# Altium PCB PCB.PcbDoc
Units mm, origin at the board's own origin, x right, y up, seen from the top; angles counter-clockwise.
Board outline 99.82 x 100 mm, 2 copper layers (Top Layer, Bottom Layer); 19 components, 25 nets, 103 pads, 1 vias.
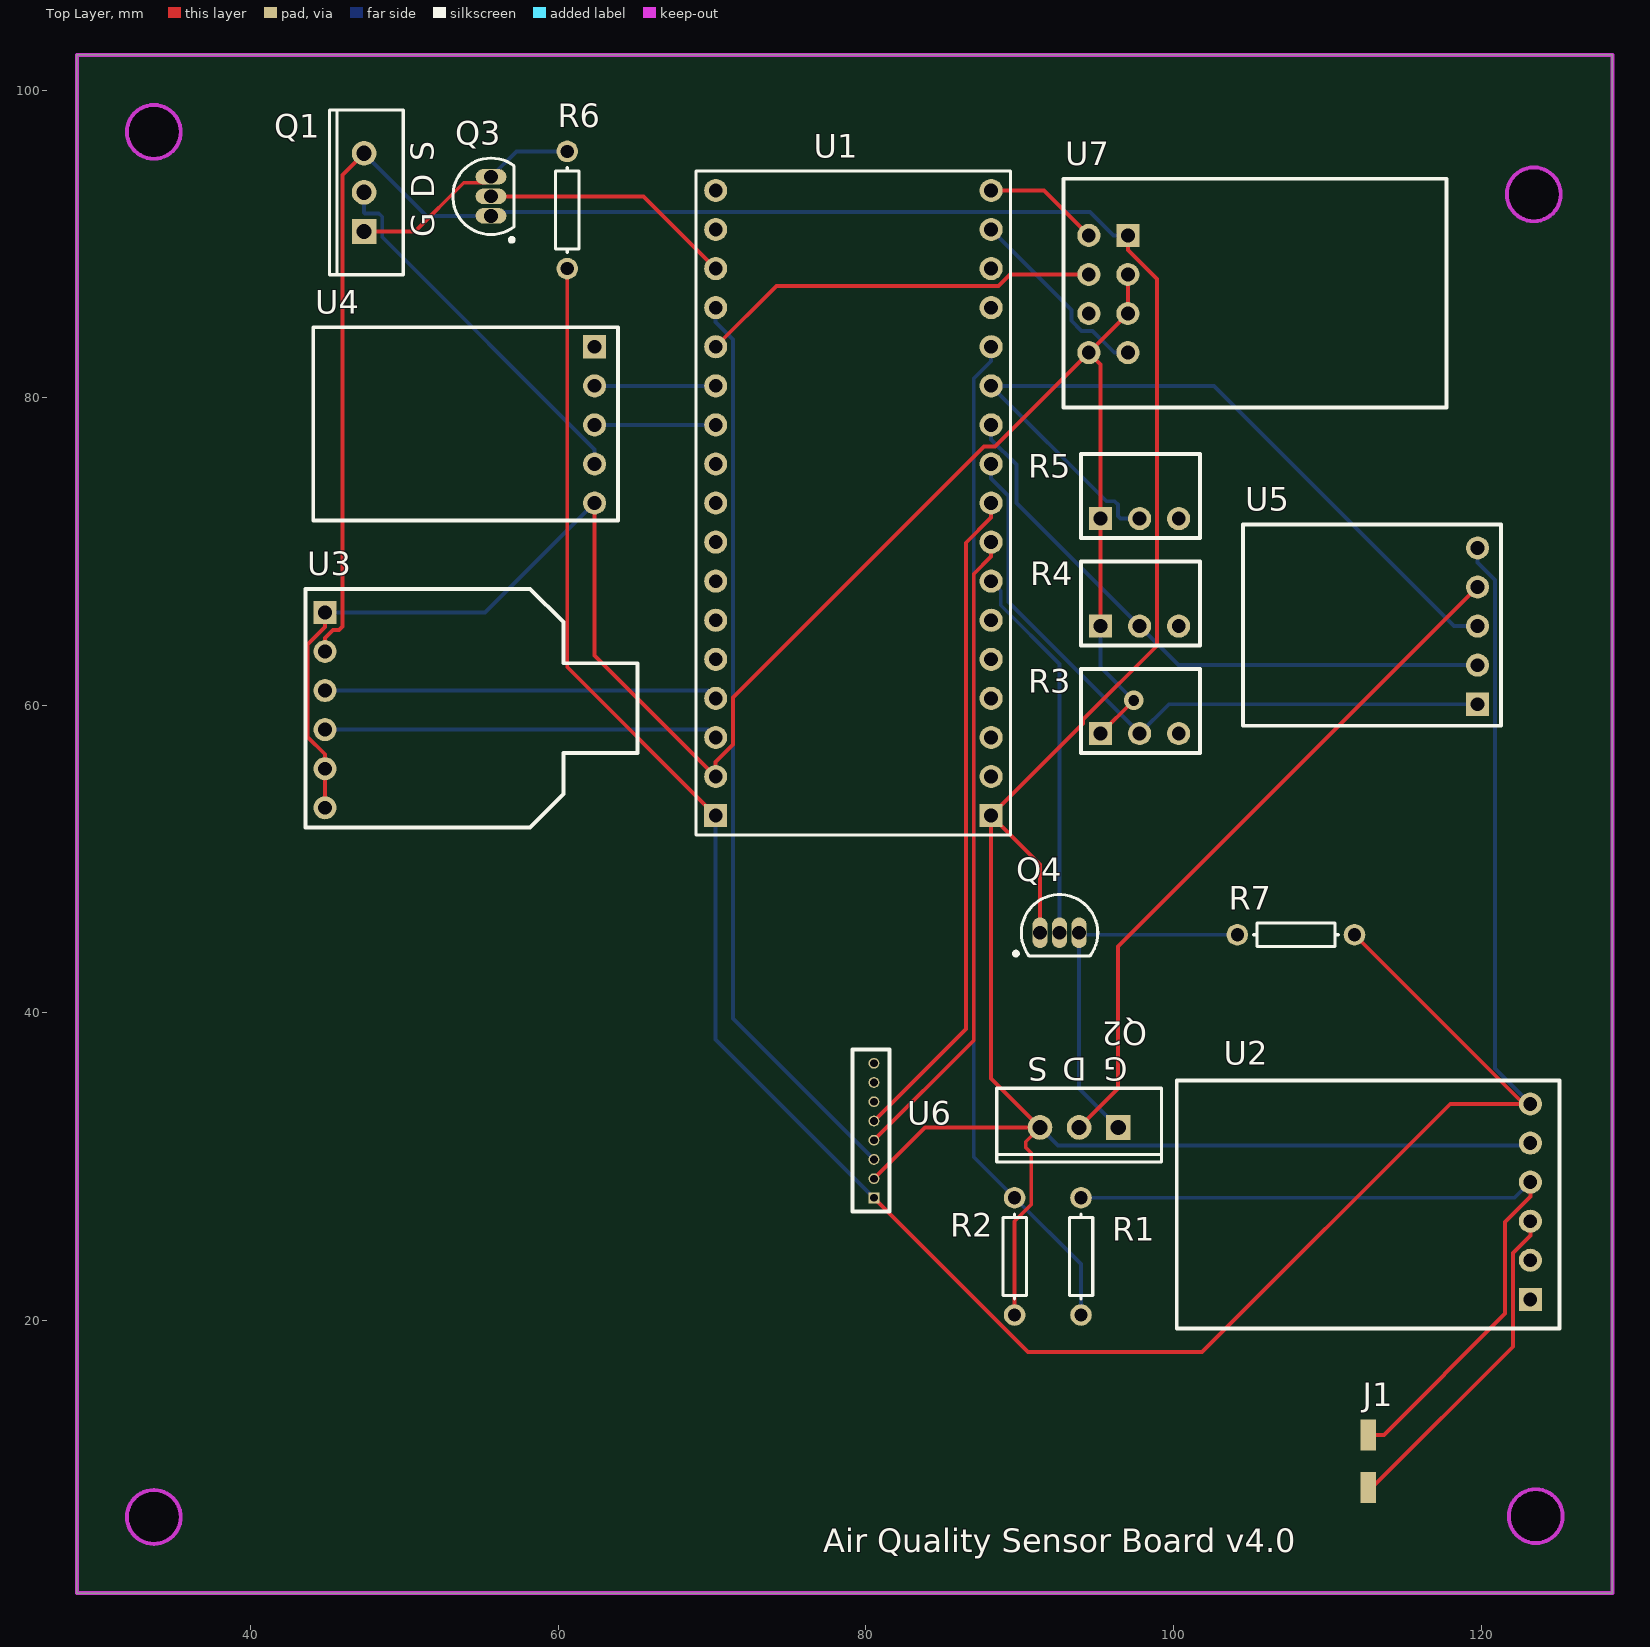
[diagram p0: Top Layer view]
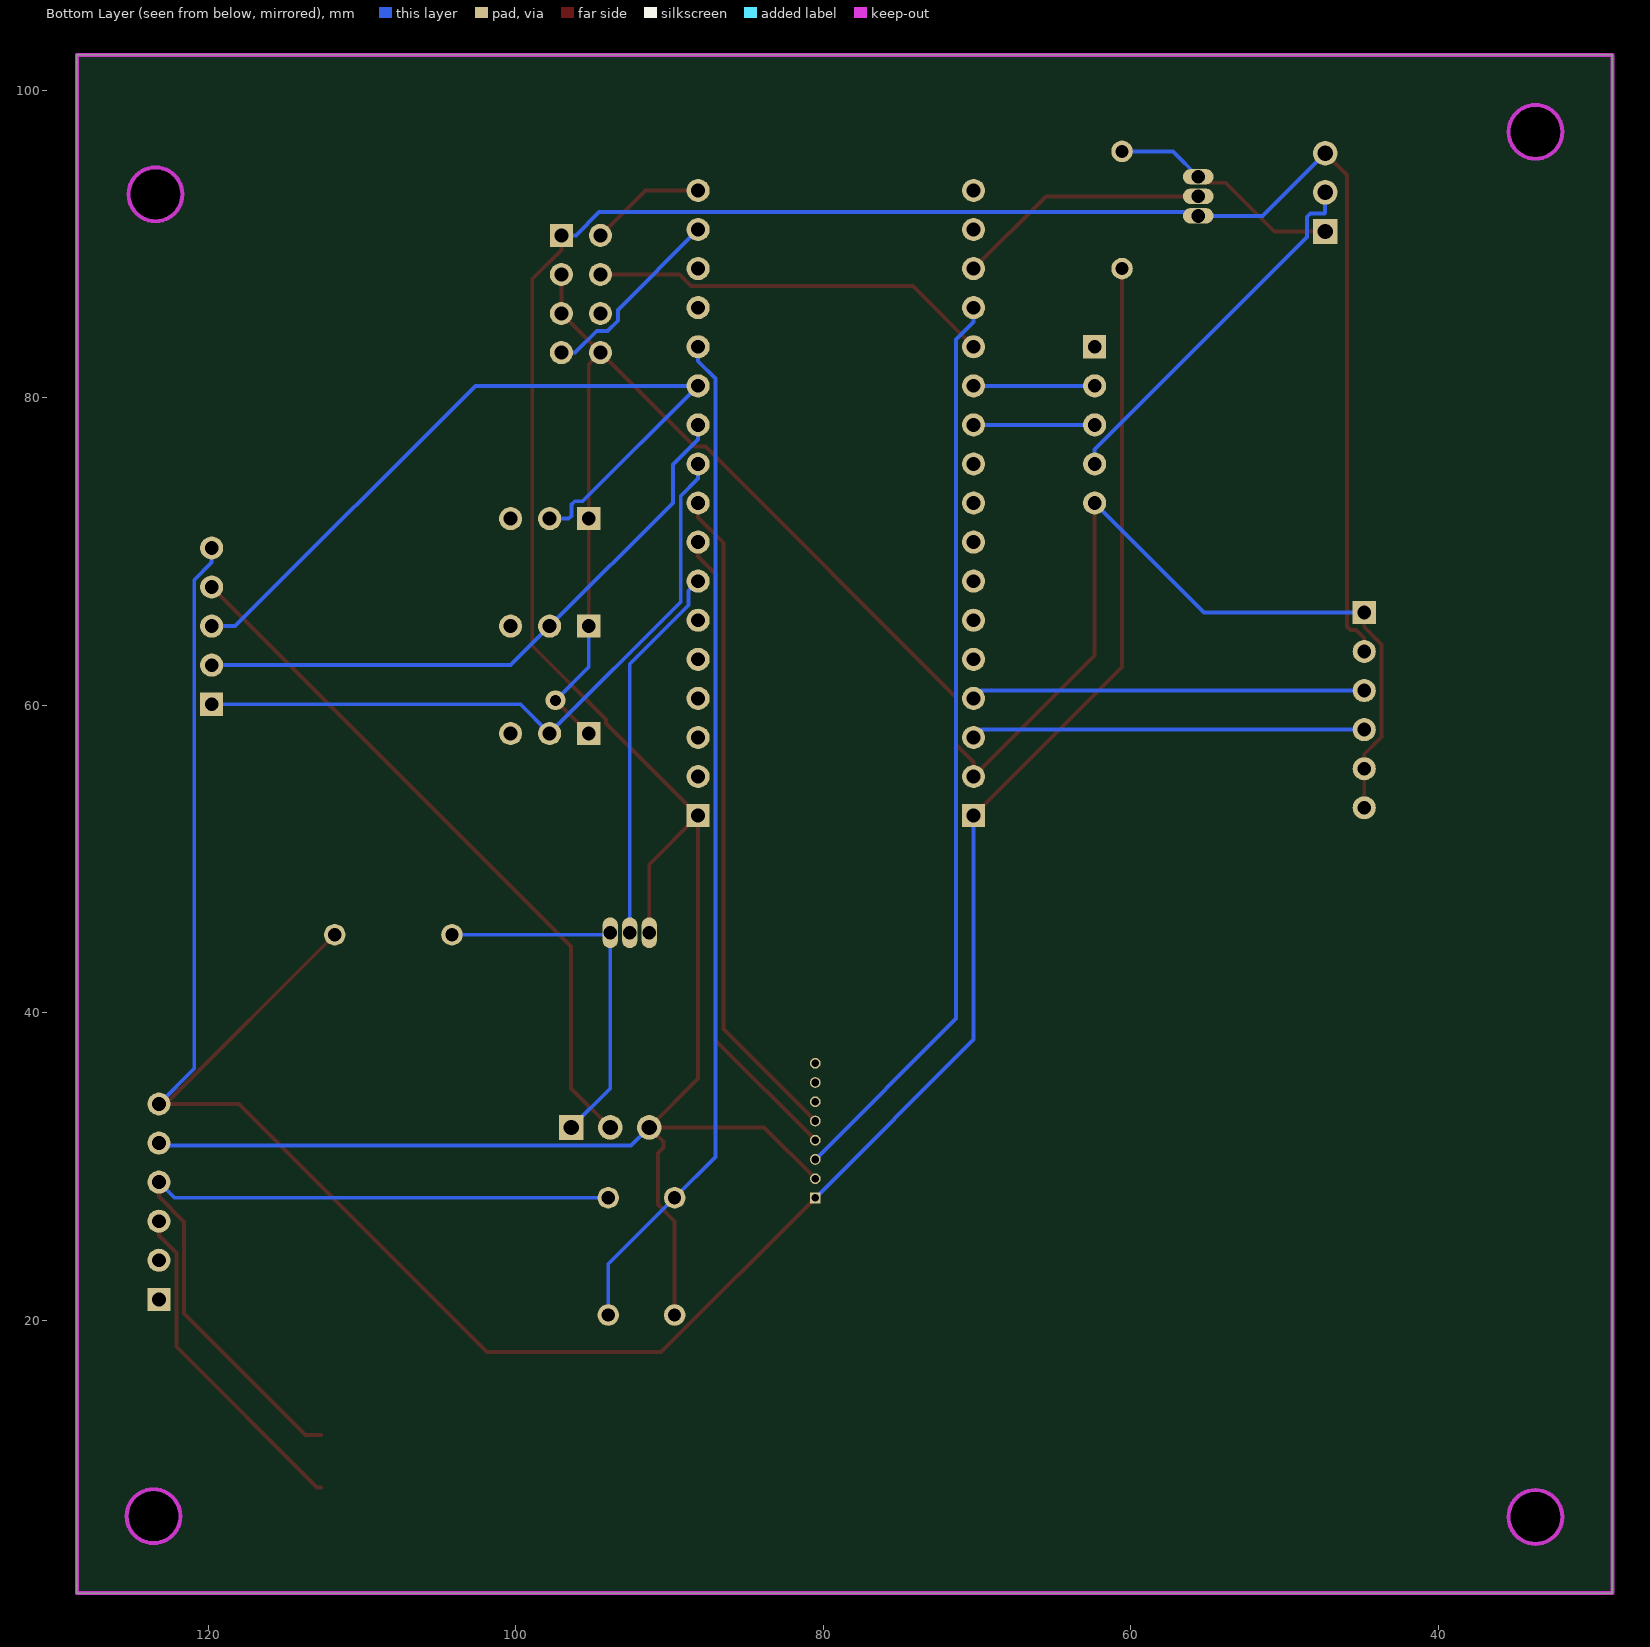
[diagram p1: Bottom Layer view, seen from below]

## Layer stack, top to bottom
Top Solder: solder mask 0.0102, Solder Resist, Dk 3.5
Top Layer: signal copper 0.0356
Dielectric 1: dielectric 0.32, FR-4, Dk 4.8
Bottom Layer: signal copper 0.0356
Bottom Solder: solder mask 0.0102, Solder Resist, Dk 3.5

## Board outline
28.702,2.286 28.702,102.286 128.524,102.286 128.524,2.286
cut-out: 121.665,93.222 ccw(c123.415,93.222) 123.415,91.472 ccw(c123.415,93.222) 125.165,93.222 ccw(c123.415,93.222) 123.415,94.972 ccw(c123.415,93.222)
cut-out: 121.792,7.286 ccw(c123.542,7.286) 123.542,5.536 ccw(c123.542,7.286) 125.292,7.286 ccw(c123.542,7.286) 123.542,9.036 ccw(c123.542,7.286)
cut-out: 31.952,7.286 ccw(c33.702,7.286) 33.702,5.536 ccw(c33.702,7.286) 35.452,7.286 ccw(c33.702,7.286) 33.702,9.036 ccw(c33.702,7.286)
cut-out: 33.702,95.536 cw(c33.702,97.286) 31.952,97.286 cw(c33.702,97.286) 33.702,99.036 cw(c33.702,97.286) 35.452,97.286 cw(c33.702,97.286)

## Design rules (kind name [scope] priority, off if disabled: settings)
Clearance [All] p1: gap=0.254 ignorepadtopadclearanceinfootprint=FALSE except(0: Arc-Hole Track-Hole SMDPad-Hole THPad-Hole Via-Hole Fill-Hole Poly-Hole Region-Hole Text-Hole)
PolygonConnect [All] p1: connectstyle=Relief reliefconductorwidth=0.254 reliefentries=4 polygonreliefangle="90 Angle" airgapwidth=0.254
RoutingVias [All] p1: holewidth=0.711 width=1.27 viastyle="Through Hole" minholewidth=0.711 minwidth=1.27 maxholewidth=0.711 maxwidth=1.27
SolderMaskExpansion [All] p1: expansion=0.102
Width [All] p1: maxlimit=0.254 minlimit=0.254 preferedwidth=0.254
30 further rules are at their usual default settings.

## Components (designator, comment, footprint, x,y, rotation, side; value= is the part's Value field where it differs from the comment)
J1 "Battery" Battery 112.268,13.208 r270 top
Q1 "MOSFET-N" TO-220-AB 47.371,93.345 r90 top
Q2 "MOSFET-N" TO-220-AB 93.853,32.559 r180 top
Q3 "2N5551" TO-92A 55.626,93.091 r0 top
Q4 "2N5551" TO-92A 92.583,45.212 r270 top
R1 "Res1" AXIAL-0.3 93.98,24.177 r90 top value=1K
R2 "Res1" AXIAL-0.3 89.662,24.177 r90 top value=1K
R3 "potentiometer" potentiometer 100.33,58.166 r90 top
R4 "potentiometer" potentiometer 100.33,65.151 r90 top
R5 "potentiometer" potentiometer 100.33,72.136 r90 top
R6 "Res1" AXIAL-0.3 60.579,92.202 r270 top value=1K
R7 "Res1" AXIAL-0.3 107.95,45.085 r0 top value=1K
U1 "STM32_Dev" STM32_Dev 68.834,74.168 r0 top
U2 "18650" 18650_Manage 123.19,21.383 r0 top
U3 "BME680_Dev" BME680_Dev 44.831,53.34 r0 top
U4 "ATGM336H_Dev" AGTM336H_Dev 62.357,83.312 r180 top
U5 "MiCS-6814_Dev" MiCS6814 119.761,70.231 r180 top
U6 "PMS5003" PMS5003 80.518,27.98 r0 top
U7 "esp01" ESP01 94.488,82.931 r0 top

## Footprints (in the part's own frame and the unit in brackets; to place one, negate y for a bottom-side part, rotate by r counter-clockwise, add the part's x,y. Pads: shape width x height; smd on the part's side, far side on the other; paste and mask are expansions set on the pad)
18650_Manage [mm]
  rect 1.5x1.5 hole 0.9: 1(0,0)
  round 1.5 hole 0.9: 2(0,2.54) 3(0,5.08) 4(0,7.62) 5(0,10.16) 6(0,12.7)
  silkscreen extent -22.99,-1.91 1.91,14.22
AGTM336H_Dev [mm]
  round 1.5 hole 0.9: 1(0,10.16) 2(0,7.62) 3(0,5.08) 4(0,2.54)
  rect 1.5x1.5 hole 0.9: 5(0,0)
  silkscreen extent -1.52,-1.27 18.29,11.3
AXIAL-0.3 [mm] "Axial Device, Thru-Hole; 2 Leads; 0.3 in Pin Spacing"
  round 1.4 hole 0.85: 1(-3.81,0) 2(3.81,0)
  silkscreen extent -2.77,-0.76 2.77,0.76
Battery [mm]
  rect 2x1 smd: 1(0.635,0.381) 2(4.064,0.381)
BME680_Dev [mm]
  rect 1.5x1.5 hole 0.9: 1(0,12.7)
  round 1.5 hole 0.9: 2(0,10.16) 3(0,7.62) 4(0,5.08) 5(0,2.54) 6(0,0)
  silkscreen extent -1.27,-1.27 20.32,14.22
ESP01 [mm]
  rect 1.5x1.5 hole 0.9: 1(2.54,7.62)
  round 1.5 hole 0.9: 2(2.54,5.08) 3(2.54,2.54) 4(2.54,0) 5(0,0) 6(0,2.54) 7(0,5.08) 8(0,7.62)
  silkscreen extent -1.65,-3.56 23.24,11.3
MiCS6814 [mm]
  rect 1.5x1.5 hole 0.9: 1(0,10.16)
  round 1.5 hole 0.9: 2(0,7.62) 3(0,5.08) 4(0,2.54) 5(0,0)
  silkscreen extent -1.52,-1.52 15.24,11.56
PMS5003 [mm] "Molex 1.25mm 8p"
  rect 0.7x0.7 hole 0.5: 1(0,0)
  round 0.7 hole 0.5: 2(0,1.25) 3(0,2.5) 4(0,3.75) 5(0,5) 6(0,6.25) 7(0,7.5) 8(0,8.75)
  silkscreen extent -1.4,-0.89 1.02,9.65
potentiometer [mm]
  rect 1.5x1.5 hole 0.9: 1(0,5.08)
  round 1.5 hole 0.9: 2(0,2.54) 3(0,0)
  silkscreen extent -1.27,-1.4 4.19,6.35
STM32_Dev [mm]
  round 1.5 hole 0.9: 1(19.304,19.304) 2(19.304,16.764) 3(19.304,14.224) 4(19.304,11.684) 5(19.304,9.144) 6(19.304,6.604) 7(19.304,4.064) 8(19.304,1.524) 9(19.304,-1.016) 10(19.304,-3.556) 11(19.304,-6.096) 12(19.304,-8.636) 13(19.304,-11.176) 14(19.304,-13.716) 15(19.304,-16.256) 16(19.304,-18.796) 19(1.397,-18.796) 20(1.397,-16.256) 21(1.397,-13.716) 22(1.397,-11.176) 23(1.397,-8.636) 24(1.397,-6.096) 25(1.397,-3.556) 26(1.397,-1.016) 27(1.397,1.524) 28(1.397,4.064) 29(1.397,6.604) 30(1.397,9.144) 31(1.397,11.684) 32(1.397,14.224) 33(1.397,16.764) 34(1.397,19.304)
  rect 1.5x1.5 hole 0.9: 17(19.304,-21.336) 18(1.397,-21.336)
  silkscreen extent 0.13,-22.61 20.57,20.57
TO-92A [mm] "TO, Flat Index; 3 In-Line, Axial Leads; Body Dia. 4.5mm; Leads 0.51 x 0.48 mm (max)"
  oval 2x1 hole 0.9: 1(0,-1.27) 2(0,0) 3(0,1.27)
  silkscreen extent -2.48,-2.95 1.5,2.48, body extent -2.48,-2.5 1.5,2.5, height 6.86
TO-220-AB [mm] "TO, Thru-Hole, Vertical, Heatsink Mounted; 3 In-Line Leads; Pitch 2.54 mm"
  rect 1.6x1.6 hole 1: 1(-2.54,0)
  round 1.6 hole 1: 2(0,0) 3(2.54,0)
  silkscreen extent -5.35,-2.55 5.35,2.25

## Part data
Q1 Q2: "N-Channel MOSFET", LatestRevisionDate=17-Jul-2002, LatestRevisionNote="Re-released for DXP Platform.", PackageDescription="TO, Flat Index; 3 In-Line, Axial Leads; Body Dia. 4.6mm; Lead Dia. 0.5 mm (max)", PackageReference=E3, PackageVersion=1995/1996, Published=8-Jun-2000, Publisher="Altium Limited"
Q3 Q4: library part 2N3904, "NPN General Purpose Amplifier", ComponentLink1Description="Manufacturer Link", ComponentLink1URL=http://www.fairchildsemi.com/, ComponentLink2Description=Datasheet, ComponentLink2URL=http://www.fairchildsemi.com/ds/2N%2F2N3904.pdf, DatasheetVersion=1997, LatestRevisionDate=15-Jan-2003, LatestRevisionNote="PCB Footprint 'BCY-W3/D4.7' replaced", PackageDescription="TO, Flat Index; 3 In-Line, Axial Leads; Body Dia. 4.5mm; Leads 0.51 x 0.48 mm (max)", PackageReference=TO-92A, PackageVersion=Sep-1998, Published=8-Jun-2000, Publisher="Altium Limited"
R1 R2 R6 R7: "Resistor", LatestRevisionDate=17-Jul-2002, LatestRevisionNote="Re-released for DXP Platform.", PackageDescription="Axial Device, Thru-Hole; 2 Leads; 0.3 in Pin Spacing", PackageReference=AXIAL-0.3, Published=8-Jun-2000, Publisher="Altium Limited"

## Via types
v1: diameter 1.27, hole 0.711, Top Layer to Bottom Layer, 1 vias

## Nets (pads, with @x,y where several pads share a name; then routed paths per layer and width w, separated by ;. In a path a pad name is that pad's centre, name@x,y a point inside that pad or via, vN(x,y) a via of type N, cw(c..) or ccw(c..) an arc to the next point about the centre after c; other vN are vias at no path point)
3.3V: R3.1 R4.1 R5.1 U1.19 U3.1 U3.5 U3.6 U4.1 U7.2 U7.3 U7.5 | length 126.2
  Top Layer w0.254: U3.6 U3.5 44.831,56.821 43.7,57.952 43.7,63.968 44.831,65.099 U3.1 ; U4.1 62.357,63.246 U1.19 70.231,56.313 71.362,57.444 71.362,60.515 87.67,76.823 88.38,76.823 U7.5 ; R3.1 v1(97.409,60.325) ; R4.1 R5.1 95.25,82.169 U7.5 ; U7.2 U7.3 U7.5
  Bottom Layer w0.254: U3.1 55.245,66.04 U4.1 ; R4.1 95.25,62.484 v1(97.409,60.325)
+5: R6.2 R7.2 U1.18 U2.6 U5.5 U6.1 | length 175.3
  Top Layer w0.254: R6.2 60.579,62.484 U1.18 ; U6.1 90.544,17.954 101.854,17.954 117.983,34.083 U2.6@122.762,34.083 ; R7.2 U2.6@122.762,34.083 ; U2.6 U2.6@122.762,34.083
  Bottom Layer w0.254: U1.18 70.231,38.267 U6.1 ; U5.5 119.761,69.29 120.892,68.159 120.892,36.381 U2.6
GND: Q1.3 Q2.3 Q3.1 Q4.1 R2.1 U1.17 U2.5 U3.2 U6.2 U7.1 | length 217.6
  Top Layer w0.254: U3.2@45.212,63.881 U3.2 44.831,64.381 45.359,64.909 45.739,64.909 45.962,65.132 45.962,94.476 Q1.3 ; U6.2 83.847,32.559 Q2.3 ; R2.1 89.662,26.458 90.743,27.539 90.743,30.908 90.386,31.265 90.386,31.632 Q2.3 ; Q4.1 91.313,49.657 U1.17 ; U7.1 97.028,89.61 98.921,87.717 98.921,63.876 94.119,59.074 94.119,58.813 U1.17 ; U1.17 88.138,35.734 Q2.3
  Bottom Layer w0.254: Q1.3 51.435,91.821 Q3.1 55.868,92.063 94.575,92.063 96.087,90.551 U7.1 ; Q2.3 92.494,31.378 123.19,31.378 U2.5
NetJ1_1: J1.1 R1.2 U2.4 | length 51
  Top Layer w0.254: J1.1 113.665,12.573 121.551,20.459 121.551,26.423 123.19,28.062 U2.4
  Bottom Layer w0.254: R1.2 122.174,27.987 U2.4
NetJ1_2: J1.2 U2.3 | length 21.8
  Top Layer w0.254: J1.2 112.903,9.144 122.059,18.3 122.059,24.391 123.19,25.522 U2.3
NetQ1_1: Q1.1 Q3.3 R6.1 | length 15.4
  Top Layer w0.254: Q1.1 50.683,90.805 53.85,93.972 55.237,93.972 Q3.3
  Bottom Layer w0.254: Q3.3 57.277,96.012 R6.1
NetQ1_2: Q1.2 U4.2 | length 24.4
  Bottom Layer w0.254: Q1.2 47.371,92.034 47.419,91.986 48.329,91.986 48.552,91.763 48.552,90.438 62.357,76.633 U4.2
NetQ2_1: Q2.1 Q4.3 R7.1 | length 24
  Bottom Layer w0.254: Q2.1 93.853,35.099 Q4.3 93.98,45.085 R7.1
NetQ2_2: Q2.2 U5.4 | length 46.2
  Top Layer w0.254: Q2.2 96.393,35.099 96.393,44.323 U5.4
  Bottom Layer w0.254: Q2.2 Q2.2@94.119,32.825
PA1: Q4.2 U1.11 | length 24.7
  Bottom Layer w0.254: U1.11 88.761,67.449 88.761,66.508 92.583,62.686 Q4.2
PA2: U1.10 U6.4 | length 42
  Top Layer w0.254: U6.4 87.007,38.219 87.007,68.54 88.138,69.671 U1.10
PA3: U1.9 U6.5 | length 43.3
  Top Layer w0.254: U6.5 86.499,38.961 86.499,70.572 88.138,72.211 U1.9
PA4: R3.2 U1.8 U5.1 | length 44.3
  Bottom Layer w0.254: U1.8 88.138,74.751 89.269,73.62 89.269,66.719 97.79,58.198 R3.2 99.695,60.071 U5.1
PA5: R4.2 U1.7 U5.2 | length 40.1
  Bottom Layer w0.254: U1.7 88.138,77.291 89.777,75.652 89.777,73.164 R4.2 100.33,62.611 U5.2
PA6: R5.2 U1.6 U5.3 | length 51.8
  Bottom Layer w0.254: R5.2 96.55,72.136 96.381,72.305 96.381,73.044 96.158,73.267 95.643,73.267 U1.6 102.616,80.772 118.237,65.151 U5.3
PA7: R1.1 R2.2 U1.5 | length 66.3
  Bottom Layer w0.254: U1.5 88.138,82.371 87.007,81.24 87.007,30.642 R2.2 93.98,23.669 R1.1
PA8: U1.30 U7.7 | length 26.2
  Top Layer w0.254: U1.30 74.18,87.261 88.606,87.261 89.356,88.011 U7.7
PA9: U1.29 U4.4 | length 8.1
  Bottom Layer w0.254: U4.4@62.23,80.899 U4.4 U1.29
PA10: U1.28 U4.3 | length 7.9
  Bottom Layer w0.254: U4.3 U1.28
PB6: U1.21 U3.3 | length 25.6
  Bottom Layer w0.254: U3.3 69.723,60.96 U1.21
PB7: U1.20 U3.4 | length 25.6
  Bottom Layer w0.254: U3.4 69.723,58.42 U1.20
PB10: U1.2 U7.4 | length 12.6
  Bottom Layer w0.254: U1.2 93.357,85.713 93.357,85.003 94.02,84.34 94.73,84.34 96.139,82.931 U7.4
PB11: U1.1 U7.8 | length 7.6
  Top Layer w0.254: U1.1 91.567,93.472 U7.8
PB14: Q3.2 U1.32 | length 16.6
  Top Layer w0.254: Q3.2 65.532,93.091 U1.32
PB15: U1.31 U6.3 | length 59.6
  Bottom Layer w0.254: U1.31 70.231,84.911 71.362,83.78 71.362,39.636 U6.3
pads on no net: R3.3 R4.3 R5.3 U1.3 U1.4 U1.12 U1.13 U1.14 U1.15 U1.16 U1.22 U1.23 U1.24 U1.25 U1.26 U1.27 U1.33 U1.34 U2.1 U2.2 U4.5 U6.6 U6.7 U6.8 U7.6

## Keep-outs
Keep-Out Layer:
  circle w0.254: c123.415,93.222 r1.75
  circle w0.254: c123.542,7.286 r1.75
  circle w0.254: c33.702,7.239 r1.75
  circle w0.254: c33.702,97.282 r1.75
  lines w0.254: 28.702,2.286 128.524,2.286 128.524,102.286 28.702,102.286 28.702,2.286

## Silkscreen, mask and mechanical layers (free items; w line width, h text height)
Top Overlay:
  text "Air Quality Sensor Board v4.0" at 77.216,4.953 h1.52

## Text inside footprints (layer, text, board x,y; h text height)
Q1: Top Overlay "D" at 51.943,92.964 h1.5 r90; Top Overlay "G" at 51.943,90.424 h1.5 r90; Top Overlay "S" at 51.896,95.385 h1.5 r90
Q2: Top Overlay "D" at 94.361,37.084 h1.5 r180; Top Overlay "G" at 97.028,37.084 h1.5 r180; Top Overlay "S" at 91.813,37.084 h1.5 r180